# Altium PCB RTB2k Pattern Gen Adapter.PcbDoc
Units mm, origin at the board's own origin, x right, y up, seen from the top; angles counter-clockwise.
Board outline 30.26 x 34.26 mm, 2 copper layers (Top Layer, Bottom Layer), stack 1.571 mm thick; 18 components, 9 nets, 46 pads, 8 vias.
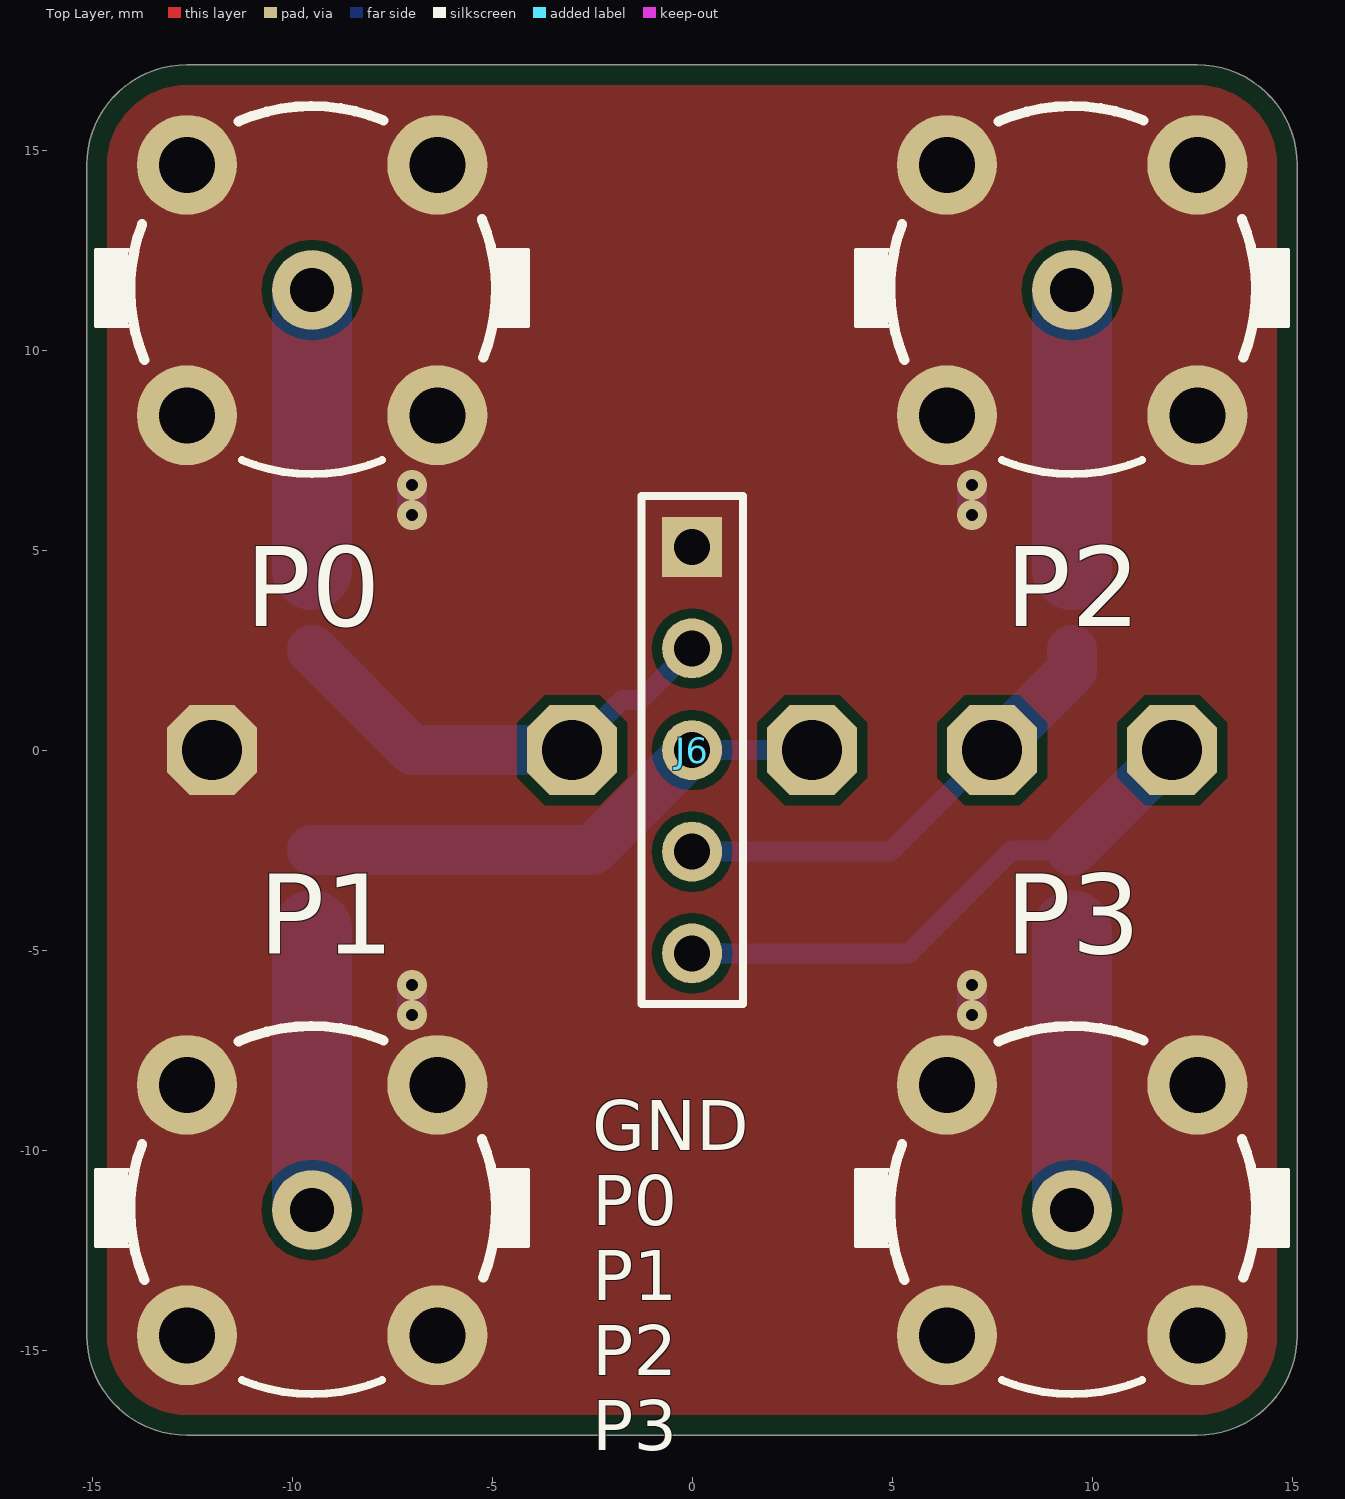
[diagram p0: Top Layer view]
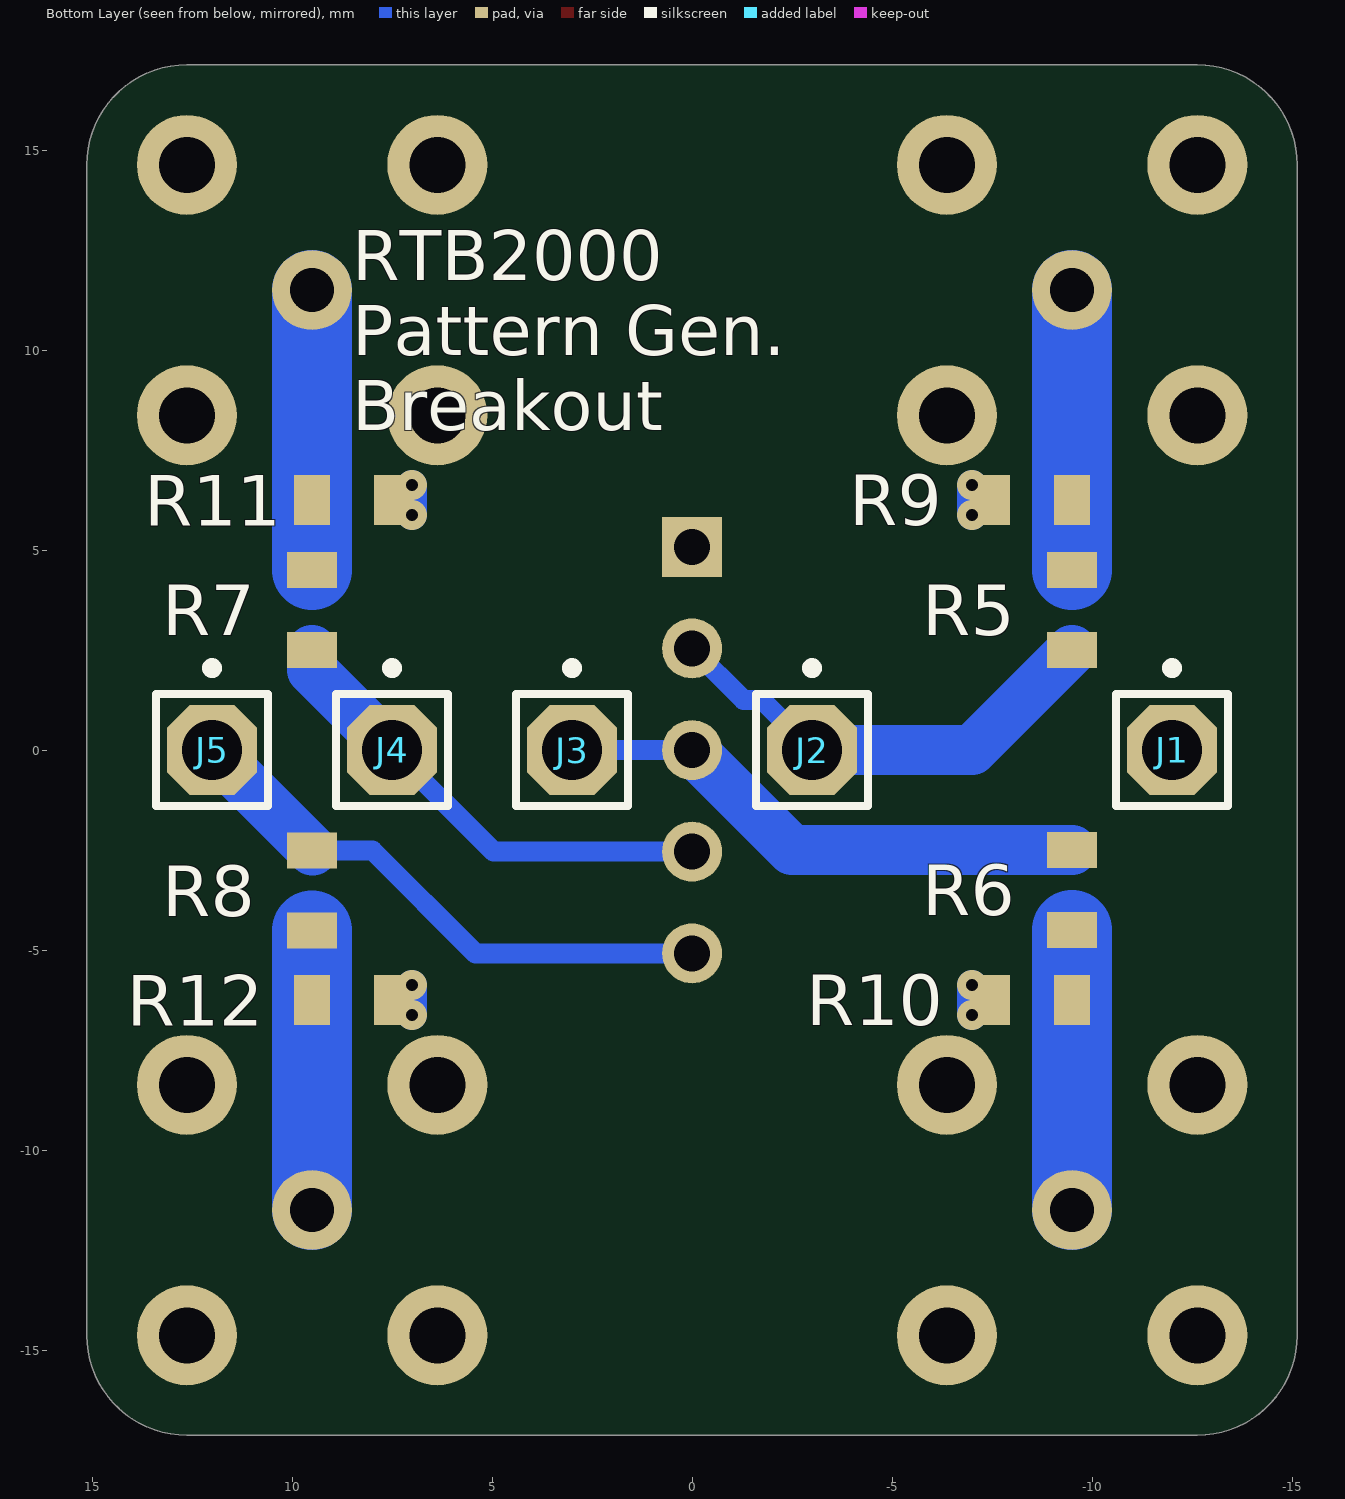
[diagram p1: Bottom Layer view, seen from below]
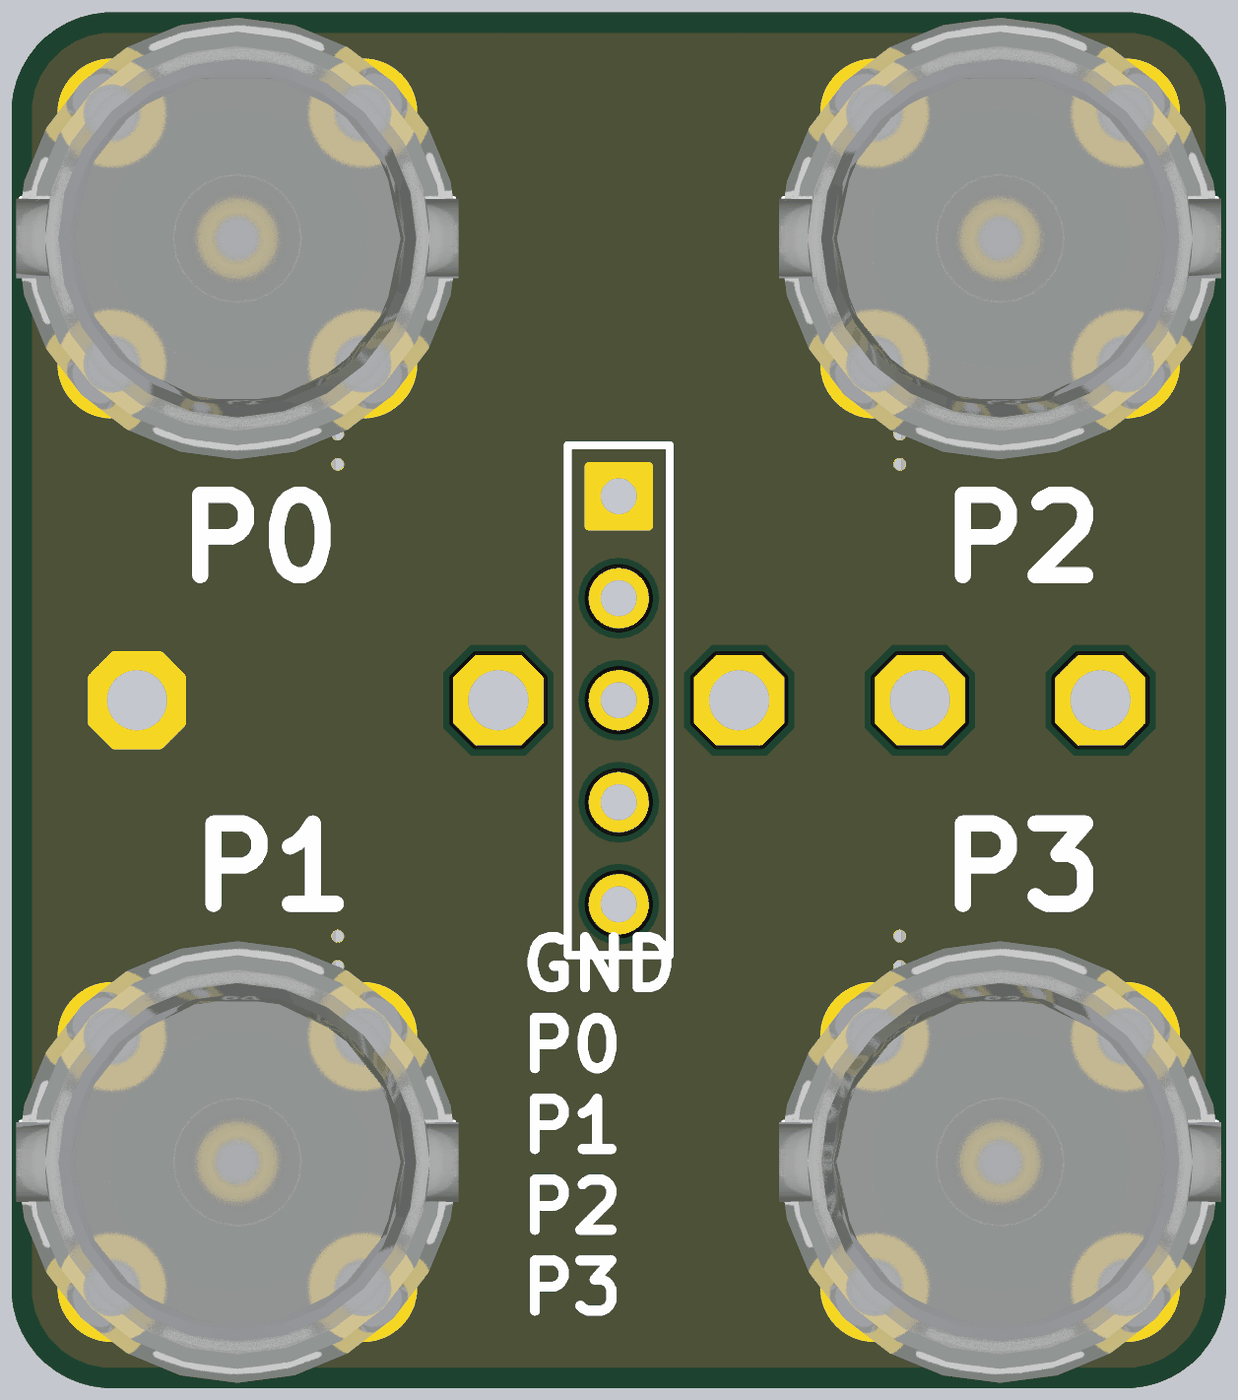
[diagram p2: 3D render of the assembled board from above, using the file's embedded part models]
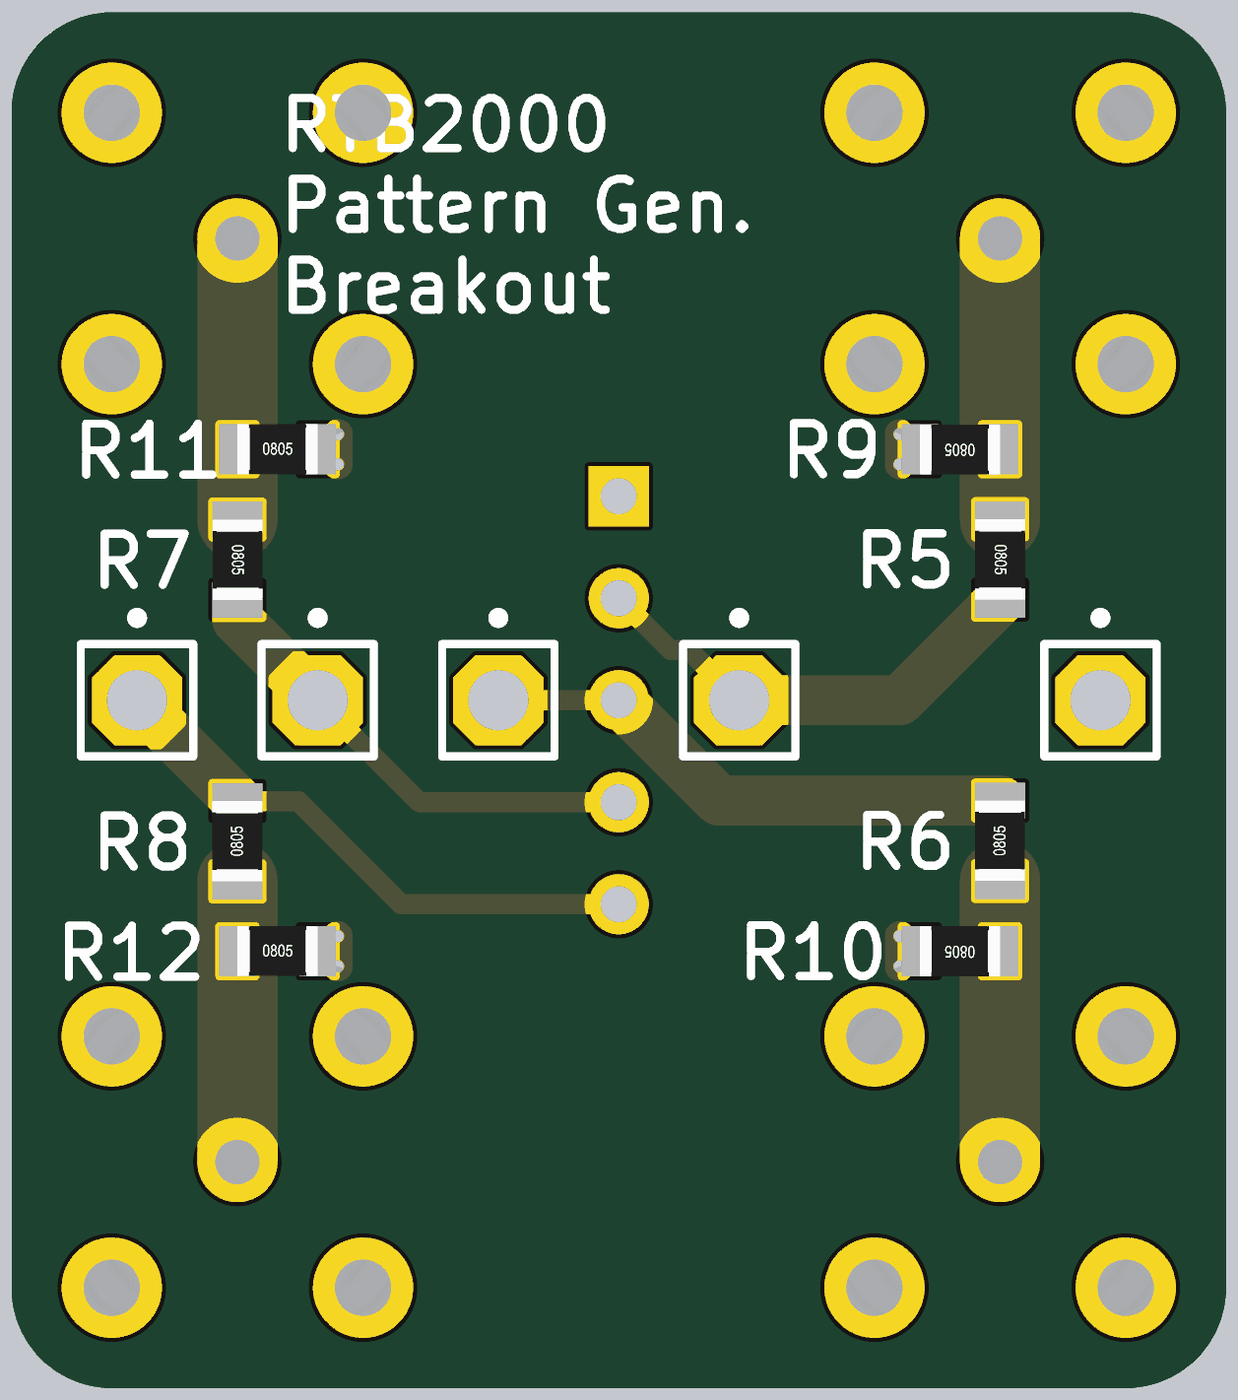
[diagram p3: 3D render of the assembled board from below, using the file's embedded part models]

## Layer stack, top to bottom
Top Solder: solder mask 0.0102, Solder Resist, Dk 3.5
Top Layer: signal copper 0.0356
Dielectric 1: dielectric 1.5, FR-4, Dk 4.8
Bottom Layer: signal copper 0.0356
Bottom Solder: solder mask 0.0102, Solder Resist, Dk 3.5

## Board outline
-15.13,-14.63 -15.13,14.63 cw(c-12.63,14.63) -12.63,17.13 12.63,17.13 cw(c12.63,14.63) 15.13,14.63 15.13,-14.63 cw(c12.63,-14.63) 12.63,-17.13 -12.63,-17.13 cw(c-12.63,-14.63)

## Design rules (kind name [scope] priority, off if disabled: settings)
BoardOutlineClearance [All] p1: gap=0.5 ignorepadtopadclearanceinfootprint=FALSE
Clearance Clearance_poly [InPolygon] p1: gap=0.25 ignorepadtopadclearanceinfootprint=FALSE
Clearance [All] p2: gap=0.25 ignorepadtopadclearanceinfootprint=FALSE
ComponentClearance [All] p1 off: gap=0.254 collisioncheckmode=3 verticalgap=0.254 showdistances=FALSE
Height [All] p1 off: minheight=0 maxheight=25.4 prefheight=12.7
HoleSize [All] p1: absolutevalues=TRUE maxlimit=6.3 minlimit=0.025 maxpercent=80.000 minpercent=20.000
PolygonConnect [All] p1: connectstyle=Direct reliefconductorwidth=0.254 reliefentries=4 polygonreliefangle="90 Angle" airgapwidth=0.254
RoutingVias [All] p1: holewidth=0.5 width=1 viastyle="Through Hole" minholewidth=0.5 minwidth=1 maxholewidth=0.5 maxwidth=1
SolderMaskExpansion [All] p1: expansion=0.102
Width [All] p1: maxlimit=10 minlimit=0.25 preferedwidth=0.5
27 further rules are at their usual default settings.

## Components (designator, comment, footprint, x,y, rotation, side; value= is the part's Value field where it differs from the comment)
J1 "Socket" PIN1 -12,0 r180 bottom locked
J2 "Socket" PIN1 -3,0 r180 bottom locked
J3 "Socket" PIN1 3,0 r180 bottom locked
J4 "Socket" PIN1 7.5,0 r180 bottom locked
J5 "Socket" PIN1 12,0 r180 bottom locked
J6 "Header 5" HDR1X5 0,5.08 r270 top
P0 "BNC_Straight" BNC_Straight -9.5,11.5 r0 top value=Value (schematic designator "P0 (comp)")
P1 "BNC_Straight" BNC_Straight -9.5,-11.5 r0 top value=Value
P2 "BNC_Straight" BNC_Straight 9.5,11.5 r0 top value=Value
P3 "BNC_Straight" BNC_Straight 9.5,-11.5 r0 top value=Value
R5 "56R" 0805R -9.5,3.506 r270 bottom
R6 "56R" 0805R -9.5,-3.5 r90 bottom
R7 "56R" 0805R 9.5,3.5 r270 bottom
R8 "56R" 0805R 9.5,-3.511 r90 bottom
R9 "75R" 0805R -8.5,6.25 r0 bottom
R10 "75R" 0805R -8.5,-6.25 r0 bottom
R11 "75R" 0805R 8.5,6.25 r180 bottom
R12 "75R" 0805R 8.5,-6.25 r180 bottom

## Footprints (in the part's own frame and the unit in brackets; to place one, negate y for a bottom-side part, rotate by r counter-clockwise, add the part's x,y. Pads: shape width x height; smd on the part's side, far side on the other; paste and mask are expansions set on the pad)
0805R [mm]
  rect 0.9x1.25 smd: 1(-1,0) 2(1,0)
  body extent -1,-0.62 1,0.63, height 0.5
BNC_Straight [mm] "BNC Straight pcb socket"
  round 2 hole 1.1: 1(0,0)
  round 2.5 hole 1.4: 2(-3.13,-3.13) 2(-3.13,3.13) 2(3.13,-3.13) 2(3.13,3.13)
  silkscreen extent -5.4,-4.6 5.4,4.6, body extent -5.51,-5.5 5.51,5.5, height 13.8
HDR1X5 [mm] "Connector; Header; 5 Position"
  rect 1.5x1.5 hole 0.9: 1(0,0)
  round 1.5 hole 0.9: 2(2.54,0) 3(5.08,0) 4(7.62,0) 5(10.16,0)
  silkscreen extent -1.27,-1.27 11.43,1.27
PIN1 [mm] "Connector; Plug"
  oct 2.25x2.25 hole 1.5: 1(0,0)
  silkscreen extent -1.4,-1.4 1.4,2.17

## Part data
J6: "Header, 5-Pin", LatestRevisionDate=17-Jul-2002, LatestRevisionNote="Re-released for DXP Platform.", Publisher="Altium Limited"
P0 P1 P2 P3: "BNC Connector (Straight)"
R5 R6 R7 R8 R9 R10 R11 R12: library part Resistor
J1 J2 J3 J4 J5: LatestRevisionDate=17-Jul-2002, LatestRevisionNote="Re-released for DXP Platform.", Publisher="Altium Limited"

## Via types
v1: diameter 0.75, hole 0.3, Top Layer to Bottom Layer, tented both sides, 8 vias

## Nets (pads, with @x,y where several pads share a name; then routed paths per layer and width w, separated by ;. In a path a pad name is that pad's centre, name@x,y a point inside that pad or via, vN(x,y) a via of type N, cw(c..) or ccw(c..) an arc to the next point about the centre after c; other vN are vias at no path point)
GND: J1.1 J6.1 P0.2 P1.2 P2.2 P3.2 R9.2 R10.2 R11.2 R12.2 | length 3
  Bottom Layer w0.75: v1(-7,-6.625) v1(-7,-5.875) ; v1(-7,5.875) v1(-7,6.625) ; v1(7,-6.625) v1(7,-5.875) ; v1(7,5.875) v1(7,6.625)
NetJ2_1: J2.1 J6.2 R5.2 | length 11.6
  Bottom Layer w0.5: J2.1 -1.75,1.25 -1.29,1.25 J6.2
  Bottom Layer w1.25: R5.2 -6.994,0 J2.1
NetJ3_1: J3.1 J6.3 R6.2 | length 13.5
  Bottom Layer w0.5: J6.3 J3.1
  Bottom Layer w1.25: R6.2 -2.5,-2.5 J6.3
NetJ4_1: J4.1 J6.4 R7.2 | length 11.9
  Bottom Layer w0.5: J6.4 4.96,-2.54 J4.1
  Bottom Layer w1.25: J4.1 9.5,2 R7.2
NetJ5_1: J5.1 J6.5 R8.2 | length 14.1
  Bottom Layer w0.5: J6.5 5.418,-5.08 7.987,-2.511 R8.2@9.489,-2.511
  Bottom Layer w1.25: R8.2@9.489,-2.511 J5.1
NetP0_1: P0.1 R5.1 R9.1 | length 7
  Bottom Layer w2: R5.1 P0.1
NetP1_1: P1.1 R6.1 R10.1 | length 7
  Bottom Layer w2: P1.1 R6.1
NetP2_1: P2.1 R7.1 R11.1 | length 7
  Bottom Layer w2: R7.1 P2.1
NetP3_1: P3.1 R8.1 R12.1 | length 7
  Bottom Layer w1.5: R8.1 R8.1@9.5,-4.5
  Bottom Layer w2: P3.1 R8.1

## Polygon pours and split planes (outlines as drawn)
GND on Top Layer "GND" (solid, remove dead copper, pour order 14): -15.13,-14.63 -15.13,14.63 cw(c-12.63,14.63) -12.63,17.13 12.63,17.13 cw(c12.63,14.63) 15.13,14.63 15.13,-14.63 cw(c12.63,-14.63) 12.63,-17.13 -12.63,-17.13 cw(c-12.63,-14.63)

## Silkscreen, mask and mechanical layers (free items; w line width, h text height)
Top Overlay:
  text "GND / P0 / P1 / P2 / P3" at -2.5,-17.5 h1.25
Bottom Overlay:
  text "RTB2000 / Pattern Gen. / Breakout" at 8.5,8 h1.25
Board Outline:
  the board outline again, w0.1